# Altium PCB pyboard.PcbDoc
Units mil, origin at the board's own origin, x right, y up, seen from the top; angles counter-clockwise.
Board outline 1338.58 x 1574.8 mil, 2 copper layers (Top, Bottom), stack 62.441 mil thick; 58 components, 68 nets, 249 pads, 63 vias.
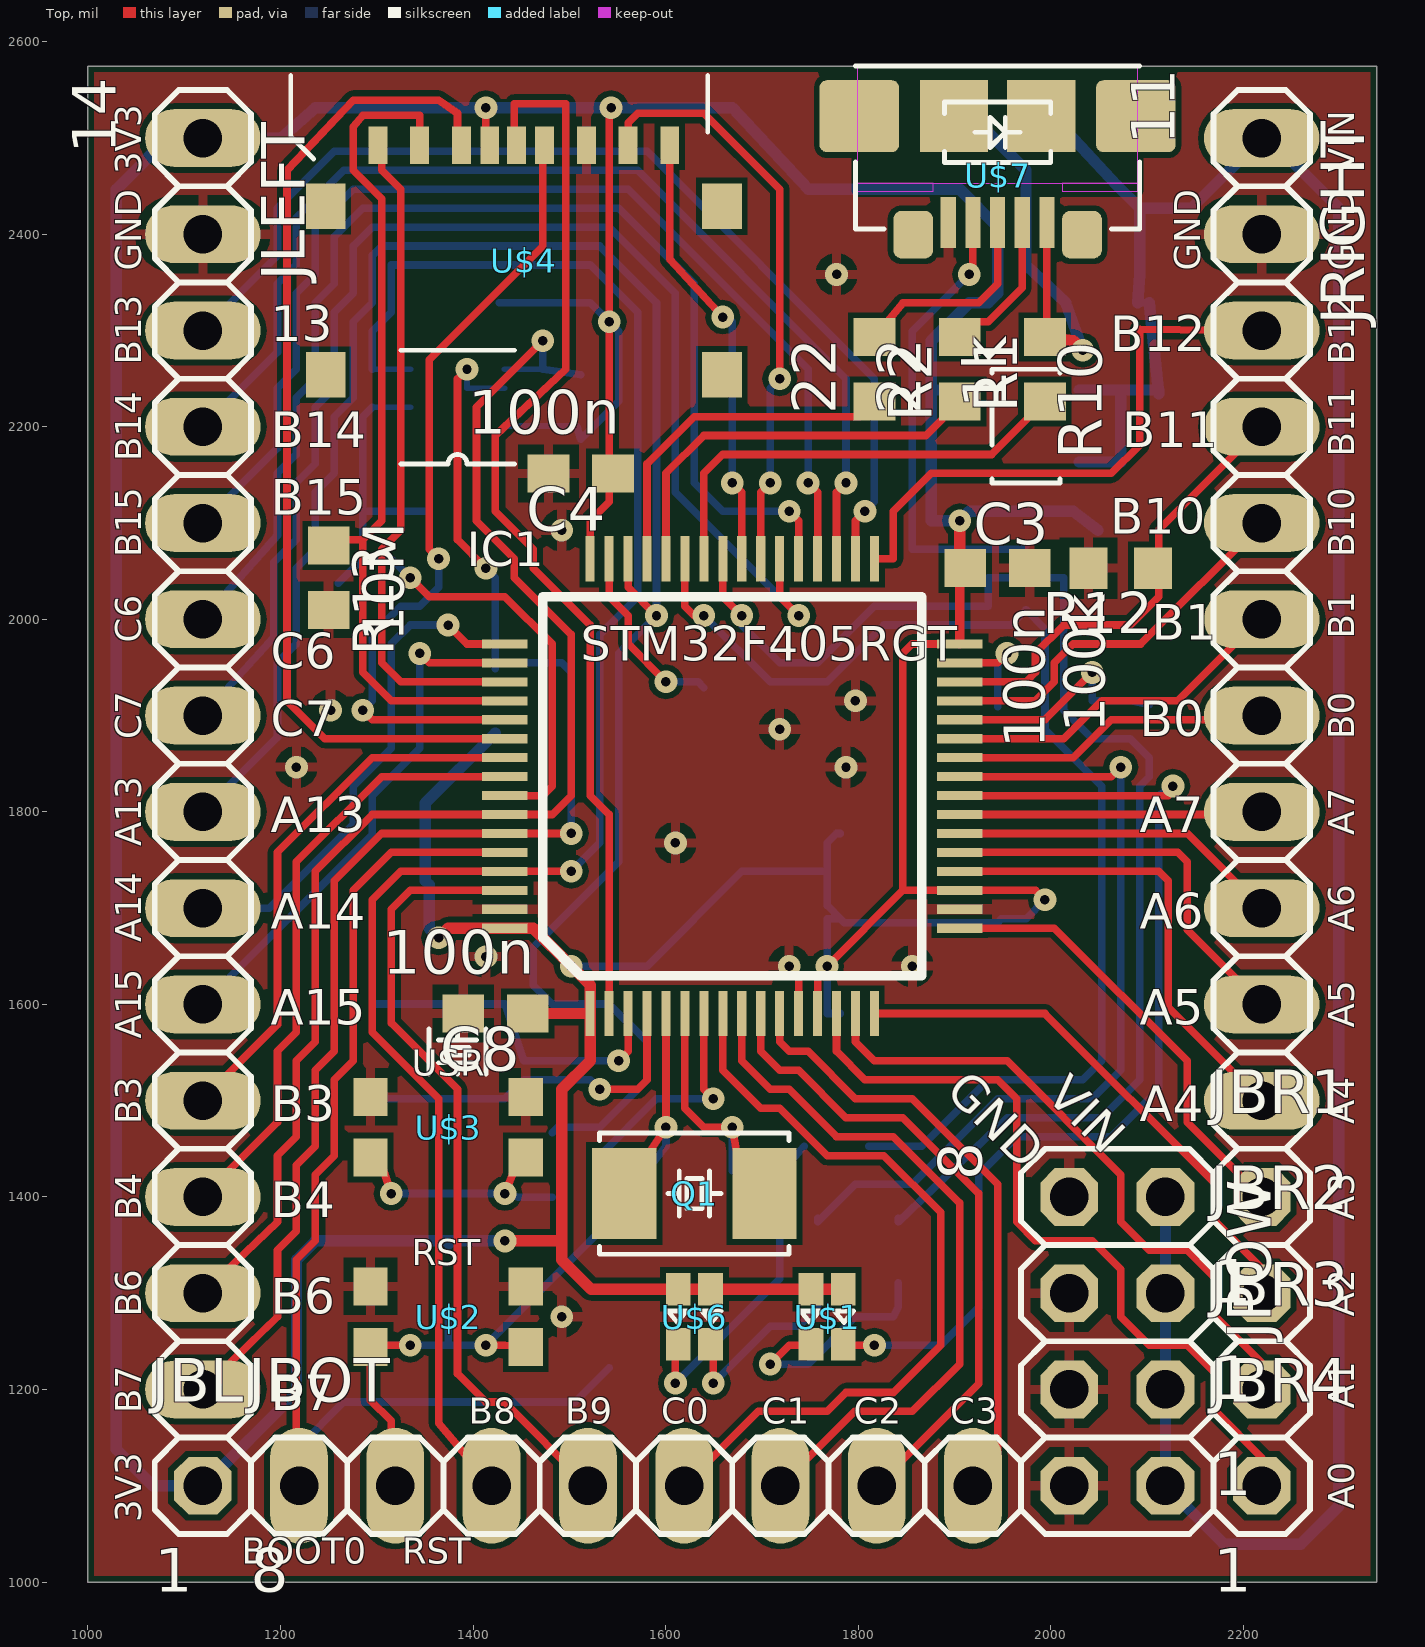
[diagram p0: Top view]
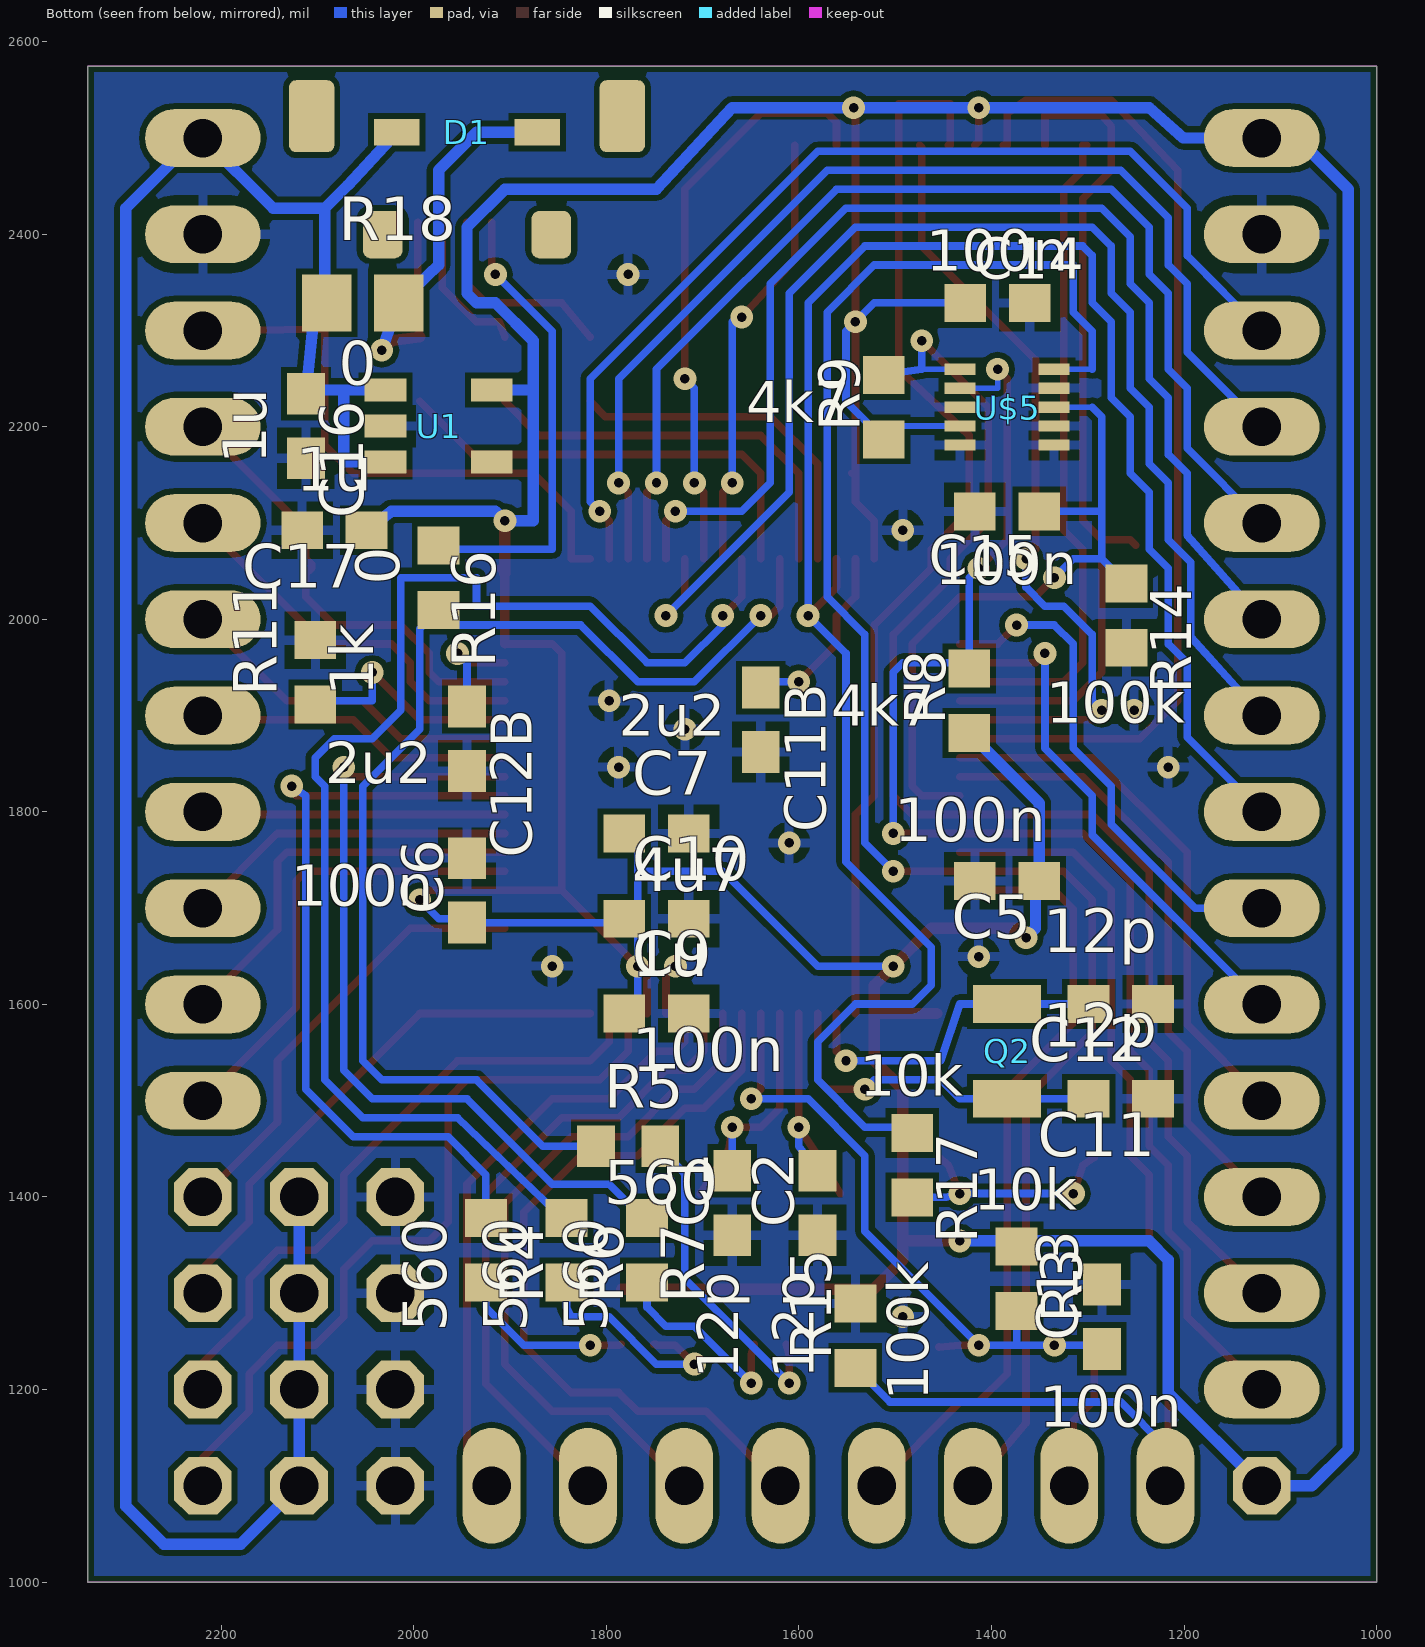
[diagram p1: Bottom view, seen from below]

## Layer stack, top to bottom
Top Solder: solder mask 0.4, Solder Resist, Dk 3.5
Top: signal copper 0.7087
Dielectric 1: core 61.0236, FR-4, Dk 4.8
Bottom: signal copper 0.7087
Bottom Solder: solder mask 0.4, Solder Resist, Dk 3.5

## Board outline
1000,1000 2338.58,1000 2338.58,2574.8 1000,2574.8

## Design rules (kind name [scope] priority, off if disabled: settings)
Clearance [All] p1: gap=5.91
Clearance "Clearance (Same Net)" [All] p2: gap=0
HoleSize HoleSize_1 [All] p1: absolutevalues=TRUE maxlimit=100000 minlimit=9.84 maxpercent=80.000 minpercent=20.000
HoleSize [All] p2: absolutevalues=TRUE maxlimit=100 minlimit=1 maxpercent=80.000 minpercent=20.000
HoleToHoleClearance mdViaViaSameLayer [All] p1: gap=7.87 allowstackedmicrovias=TRUE
HoleToHoleClearance [All] p2: gap=10 allowstackedmicrovias=TRUE
PasteMaskExpansion mlMinCreamFrame [All] p1: expansion=0
PasteMaskExpansion [All] p2: expansion=0
PolygonConnect PolygonConnect_1 [All] p1: connectstyle=Relief reliefconductorwidth=10 reliefentries=4 polygonreliefangle="90 Angle" airgapwidth=10
PolygonConnect [All] p2: connectstyle=Relief reliefconductorwidth=10 reliefentries=4 polygonreliefangle="90 Angle" airgapwidth=10
RoutingVias [All] p1: holewidth=28 width=50 viastyle="Through Hole" minholewidth=28 minwidth=50 maxholewidth=28 maxwidth=50
SilkToSilkClearance [All] p1 off: silktosilkclearance=10
SilkToSolderMaskClearance [IsPad] p1 off: minsilkscreentomaskgap=10 clearancetoexposedcopper=TRUE
SolderMaskExpansion mlMinStopFrame [All] p1: expansion=0
SolderMaskExpansion [All] p2: expansion=4
Width Width_1 [All] p1: maxlimit=100000 minlimit=5.91 preferedwidth=10
Width [All] p2: maxlimit=10 minlimit=10 preferedwidth=10
25 further rules are at their usual default settings.

## Components (designator, comment, footprint, x,y, rotation, side; value= is the part's Value field where it differs from the comment)
C1 "12p" C0603 1669.29,1393.7 r90 bottom
C2 "12p" C0603 1580.71,1393.7 r90 bottom
C3 "100n" C0603 1944.88,2053.15 r0 top
C4 "100n" C0603 1511.81,2151.57 r180 top
C5 "100n" C0603 1383.86,1728.35 r0 bottom
C6 "100n" C0603 1944.88,1718.5 r90 bottom
C7 "4u7" C0603 1748.03,1777.56 r180 bottom
C8 "100n" C0603 1423.23,1590.55 r180 top
C9 "100n" C0603 1748.03,1590.55 r180 bottom
C10 "1u" C0603 1748.03,1688.98 r180 bottom
C11 "12p" C0603 1265.75,1501.97 r0 bottom
C11B "2u2" C0603 1639.76,1895.67 r270 bottom
C12 "12p" C0603 1265.75,1600.39 r0 bottom
C12B "2u2" C0603 1944.88,1875.98 r270 bottom
C13 "100n" C0603 1285.43,1275.59 r90 bottom
C14 "100n" C0603 1393.7,2328.74 r180 bottom
C15 "100n" C0603 1383.86,2112.2 r0 bottom
C16 "1u" C0603 2112.2,2200.79 r270 bottom
C17 "1u" C0603 2082.68,2092.52 r0 bottom
D1 "" SOD-123 1944.88,2505.91 r0 bottom
IC1 "STM32F405RGT" LQFP64 1669.29,1826.77 r0 top
JBL "1" 1X01 1119.29,1100 r0 top
JBOT "8" 1X08 1569.29,1100 r0 top
JBR1 "1" 1X01 2219.29,1400 r0 top
JBR2 "1" 1X01 2219.29,1300 r0 top
JBR3 "1" 1X01 2219.29,1200 r0 top
JBR4 "1" 1X01 2219.29,1100 r0 top
JLEFT "14" 1X14 1119.29,1850 r270 top
JPOW "8" 2X04 2069.29,1250 r270 top
JRIGHT "11" 1X11 2219.29,2000 r270 top
Q1 "" TXC-SMD-50X32 1629.92,1403.54 r0 top
Q2 "" TXC-SMD-32X15 1383.86,1551.18 r270 bottom
R1 "22" R0603 1905.51,2259.84 r270 top
R2 "22" R0603 1816.93,2259.84 r270 top
R3 "10k" R0603 1374.02,1314.96 r270 bottom
R4 "560" R0603 1925.2,1344.49 r270 bottom
R5 "560" R0603 1777.56,1452.76 r180 bottom
R6 "560" R0603 1841.54,1344.49 r270 bottom
R7 "560" R0603 1757.87,1344.49 r270 bottom
R8 "4k7" R0603 1423.23,1915.35 r90 bottom
R9 "4k7" R0603 1511.81,2220.47 r90 bottom
R10 "1k" R0603 1994.09,2259.84 r270 top
R11 "1k" R0603 2102.36,1944.88 r90 bottom
R12 "100k" R0603 2072.83,2053.15 r180 top
R13 "10M" R0603 1250,2043.31 r270 top
R14 "100k" R0603 1259.84,2003.94 r270 bottom
R15 "100k" R0603 1541.34,1255.91 r90 bottom
R16 "0" R0603 1974.41,2043.31 r270 bottom
R17 "10k" R0603 1482.28,1433.07 r270 bottom
R18 "0" R0805 2053.15,2328.74 r180 bottom
U1 "" SOT-23-5 1974.41,2200.79 r270 bottom
U$1 "" LTST-BILED-15X16 1767.72,1275.59 r0 top
U$2 "" KMR4SWITCH 1374.02,1275.59 r0 top
U$3 "" KMR4SWITCH 1374.02,1472.44 r0 top
U$4 "" MOLEX-SD-105027-PKG 1452.76,2230.31 r180 top
U$5 "" DFN10 1383.86,2220.47 r270 bottom
U$6 "" LTST-BILED-15X16 1629.92,1275.59 r0 top
U$7 "" HRS-USB-ZX62D-AB-5P8-PKG 1944.88,2522.64 r180 top

## Footprints (in the part's own frame and the unit in brackets; to place one, negate y for a bottom-side part, rotate by r counter-clockwise, add the part's x,y. Pads: shape width x height; smd on the part's side, far side on the other; paste and mask are expansions set on the pad)
1X01 [mil] "1X01"
  oct 60x60 hole 40: 1(0,0)
  silkscreen extent -50,-50 50,50
1X08 [mil] "1X08"
  oval 60x120 hole 40: 1(-350,0) 2(-250,0) 3(-150,0) 4(-50,0) 5(50,0) 6(150,0) 7(250,0) 8(350,0)
  silkscreen extent -400,-50 400,50
1X11 [mil] "1X11"
  oval 60x120 hole 40: 1(-500,0) 2(-400,0) 3(-300,0) 4(-200,0) 5(-100,0) 6(0,0) 7(100,0) 8(200,0) 9(300,0) 10(400,0) 11(500,0)
  silkscreen extent -550,-50 550,50
1X14 [mil] "1X14"
  oval 60x120 hole 40: 1(-650,0) 2(-550,0) 3(-450,0) 4(-350,0) 5(-250,0) 6(-150,0) 7(-50,0) 8(50,0) 9(150,0) 10(250,0) 11(350,0) 12(450,0) 13(550,0) 14(650,0)
  silkscreen extent -700,-50 700,50
2X04 [mil] "2X04"
  oct 60x60 hole 40: 1(-150,-50) 2(-150,50) 3(-50,-50) 4(-50,50) 5(50,-50) 6(50,50) 7(150,-50) 8(150,50)
  silkscreen extent -200,-100 200,100
C0603 [mm] "C0603"
  rect 1.1x1 smd: 1(-0.85,0) 2(0.85,0)
DFN10 [mm] "DFN10"
  rect 0.3x0.825 smd: P$1(1,1.24) P$2(0.5,1.24) P$3(0,1.24) P$4(-0.5,1.24) P$5(-1,1.24) P$6(-1,-1.24) P$7(-0.5,-1.24) P$8(0,-1.24) P$9(0.5,-1.24) P$10(1,-1.24)
HRS-USB-ZX62D-AB-5P8-PKG [mm] "HRS-USB-ZX62D-AB-5P8-PKG"
  rect 0.4x1.35 smd: P$1(-1.3,2.8) P$2(-0.65,2.8) P$3(0,2.8) P$4(0.65,2.8) P$5(1.3,2.8)
  rect 1.8x1.9 smd: P$6(-1.15,0) P$7(1.15,0)
  rrect20% 2.1x1.9 smd: P$8(-3.65,0) P$9(3.65,0)
  rrect40% 1.05x1.25 smd: P$10(-2.225,3.125) P$11(2.225,3.125)
  rrect40% 1.05x1.25 smd far side: P$12(-2.225,3.125) P$13(2.225,3.125)
  rrect31% 1.2x1.9 smd far side: P$14(4.1,0) P$15(-4.1,0)
  Top keep-out region: -3.7,-1.325 3.7,-1.325 3.7,1.775 -3.7,1.775
  Top keep-out region: -3.7,1.775 -1.7,1.775 -1.7,1.975 -3.7,1.975
  Top keep-out region: 1.7,1.775 3.7,1.775 3.7,1.975 1.7,1.975
  silkscreen extent -3.75,-1.33 3.75,2.98
KMR4SWITCH [mil] "KMR4SWITCH"
  rect 35.43x39.37 smd: P$1(80.71,31.5) P$2(-80.71,31.5) P$3(-80.71,-31.5) P$4(80.71,-31.5)
LQFP64 [mm] "LQFP64"
  rect 0.24x1.2 smd: 1(-3.75,-6) 2(-3.25,-6) 3(-2.75,-6) 4(-2.25,-6) 5(-1.75,-6) 6(-1.25,-6) 7(-0.75,-6) 8(-0.25,-6) 9(0.25,-6) 10(0.75,-6) 11(1.25,-6) 12(1.75,-6) 13(2.25,-6) 14(2.75,-6) 15(3.25,-6) 16(3.75,-6) 33(3.75,6) 34(3.25,6) 35(2.75,6) 36(2.25,6) 37(1.75,6) 38(1.25,6) 39(0.75,6) 40(0.25,6) 41(-0.25,6) 42(-0.75,6) 43(-1.25,6) 44(-1.75,6) 45(-2.25,6) 46(-2.75,6) 47(-3.25,6) 48(-3.75,6)
  rect 1.2x0.24 smd: 17(6,-3.75) 18(6,-3.25) 19(6,-2.75) 20(6,-2.25) 21(6,-1.75) 22(6,-1.25) 23(6,-0.75) 24(6,-0.25) 25(6,0.25) 26(6,0.75) 27(6,1.25) 28(6,1.75) 29(6,2.25) 30(6,2.75) 31(6,3.25) 32(6,3.75) 49(-6,3.75) 50(-6,3.25) 51(-6,2.75) 52(-6,2.25) 53(-6,1.75) 54(-6,1.25) 55(-6,0.75) 56(-6,0.25) 57(-6,-0.25) 58(-6,-0.75) 59(-6,-1.25) 60(-6,-1.75) 61(-6,-2.25) 62(-6,-2.75) 63(-6,-3.25) 64(-6,-3.75)
  silkscreen extent -5,-5 5,5
LTST-BILED-15X16 [mm] "LTST-BILED-15X16"
  rect 0.65x0.85 smd: P$1(0.425,0.725) P$2(-0.425,0.725) P$3(0.425,-0.725) P$4(-0.425,-0.725)
  silkscreen extent -0.7,-0.15 0.7,0.15
MOLEX-SD-105027-PKG [mm] "MOLEX-SD-105027-PKG"
  rect 0.5x1 smd: G$1(0.2,-6.66) P$1(3.85,-6.66) P$2(2.75,-6.66) P$3(1.65,-6.66) P$4(0.9,-6.66) P$5(-0.55,-6.66) P$6(-1.65,-6.66) P$7(-2.75,-6.66) P$8(-3.85,-6.66)
  rect 1.05x1.2 smd: M$1(5.225,-0.6) M$2(5.225,-5.05) M$3(-5.225,-0.6) M$4(-5.225,-5.05)
  silkscreen extent -4.85,-8.5 6.15,-6.3
R0603 [mm] "R0603"
  rect 1x1.1 smd: 1(-0.85,0) 2(0.85,0)
R0805 [mil] "R0805"
  rect 51.18x59.06 smd: 1(-37.4,0) 2(37.4,0)
SOD-123 [mil] "SOD-123"
  rect 47.24x27.56 smd: A(-72.83,0) K(72.83,0)
SOT-23-5 [mil] "SOT-23-5"
  rect 23.62x43.31 smd: P$1(-37.4,-55.12) P$2(0,-55.12) P$3(37.4,-55.12) P$4(37.4,55.12) P$5(-37.4,55.12)
TXC-SMD-32X15 [mm] "TXC-SMD-32X15"
  rect 1x1.8 smd: P$1(-1.25,0) P$2(1.25,0)
TXC-SMD-50X32 [mil] "TXC-SMD-50X32"
  rect 66.93x94.49 smd: P$1(-72.83,0) P$2(72.83,0)
  silkscreen extent -98,-63 98,63

## Part data
C1 C2 C3 C4 C5 C6 C7 C8 C9 C10 C11 C11B C12 C12B C13 C14 C15 C16 C17: library part C0603
D1: library part SOD-123
IC1: library part LQFP64
JBL JBR1 JBR2 JBR3 JBR4: library part 1X01
JBOT: library part 1X08
JLEFT: library part 1X14
JPOW: library part 2X04
JRIGHT: library part 1X11
Q1: library part TXC-SMD-50X32
Q2: library part TXC-SMD-32X15
R1 R2 R3 R4 R5 R6 R7 R8 R9 R10 R11 R12 R13 R14 R15 R16 R17: library part R0603
R18: library part R0805
U1: library part SOT-23-5
U$1 U$6: library part LTST-BILED-15X16
U$2 U$3: library part KMR4SWITCH
U$4: library part MOLEX-SD-105027-PKG
U$5: library part DFN10
U$7: library part HRS-USB-ZX62D-AB-5P8-PKG

## Via types
v1: diameter 23.62/23.62 (per signal layer), hole 9.84, Top to Bottom, 63 vias

## Nets (pads, with @x,y where several pads share a name; then routed paths per layer and width w, separated by ;. In a path a pad name is that pad's centre, name@x,y a point inside that pad or via, vN(x,y) a via of type N, cw(c..) or ccw(c..) an arc to the next point about the centre after c; other vN are vias at no path point)
+3V3: C3.1 C4.1 C5.1 C6.1 C7.1 C8.1 C9.1 C10.1 C14.1 C17.1 IC1.1 IC1.13 IC1.19 IC1.32 IC1.48 IC1.64 JBL.1 JLEFT.1 R3.1 R8.1 R9.1 U1.P$5 U$1.P$1 U$1.P$2 U$4.P$4 U$5.P$9 U$6.P$1 U$6.P$2 | length 7068.9
  Top w7.87: v1(1413.39,2531.5) 1413.39,2496.46 U$4.P$4 ; IC1.48 1521.65,2102.36 1541.34,2122.05 C4.1@1541.34,2151.57 ; v1(1543.31,2531.5) 1543.31,2527.56 1541.34,2525.59 v1(1541.34,2309.06) C4.1@1541.34,2151.57 ; C4.1 C4.1@1541.34,2151.57 ; IC1.13 1757.87,1629.92 v1(1767.72,1639.76) 1846.46,1718.5 ; IC1.32 1856.3,1974.41 1846.46,1964.57 1846.46,1718.5 ; C3.1@1905.51,2047.24 C3.1 ; v1(1994.09,1708.66) 1984.25,1718.5 IC1.19 1846.46,1718.5
  Top w9.84: IC1.32 C3.1@1905.51,2043.31
  Top w11.81: v1(1364.17,1669.29) 1374.02,1679.13 IC1.64 1462.6,1679.13 v1(1501.97,1639.76) 1521.65,1620.08 IC1.1 ; v1(1433.07,1354.33) 1492.13,1354.33 ; C8.1 IC1.1 ; U$1.P$1 U$1.P$2 U$6.P$1 U$6.P$2 1522.64,1304.13 1492.13,1334.65 1492.13,1354.33 ; C3.1@1905.51,2047.24 v1(1905.51,2102.36) ; 1492.13,1354.33 1492.13,1511.81 1521.65,1541.34 IC1.1
  Bottom w5.91: U$5.P$9 R9.1@1507.87,2200.79
  Bottom w7.87: JLEFT.1@1115.35,2496.06 JLEFT.1 ; JBL.1 JBL.1@1119.69,1100 ; C5.1 C5.1@1354.33,1724.41 ; R3.1 1383.86,1358.27 R3.1@1393.7,1354.33 ; C14.1 1521.65,2328.74 v1(1541.34,2309.06) 1551.18,2299.21 1551.18,2226.38 R9.1 R9.1@1507.87,2200.79 ; v1(1501.97,1639.76) 1580.71,1639.76 1679.13,1738.19 1767.72,1738.19 ; C9.1 1767.72,1590.55 v1(1767.72,1639.76) 1767.72,1688.98 C10.1 ; C7.1 1777.56,1777.56 1767.72,1767.72 1767.72,1738.19 ; 1875.98,2240.16 1877.95,2238.19 ; v1(1994.09,1708.66) 1974.41,1688.98 1948.82,1688.98 C6.1 1785.43,1685.04 C10.1 ; 1767.72,1738.19 1767.72,1702.76 C10.1
  Bottom w11.81: JLEFT.1@1115.35,2496.06 1078.74,2496.06 1029.53,2446.85 1029.53,1137.8 1067.32,1100 JBL.1 ; JLEFT.1 1200.79,2500 1236.22,2531.5 v1(1413.39,2531.5) v1(1543.31,2531.5) 1669.29,2531.5 1748.03,2446.85 1905.51,2446.85 1944.88,2407.48 1944.88,2338.58 1935.04,2328.74 1915.35,2328.74 1875.98,2289.37 1875.98,2240.16 1875.98,2102.36 v1(1905.51,2102.36) 1915.35,2112.2 2023.62,2112.2 C17.1 ; JBL.1@1119.69,1100 1216.54,1196.85 1216.54,1334.65 1236.22,1354.33 1393.7,1354.33 v1(1433.07,1354.33) ; C5.1 1350.39,1809.06 R8.1 ; C5.1@1354.33,1724.41 1354.33,1679.13 v1(1364.17,1669.29) ; 1877.95,2238.19 U1.P$5
BOOT0: IC1.60 JBOT.1 R15.1 | length 1214.4
  Top w7.87: JBOT.1 1216.54,1102.76 1216.54,1334.65 1236.22,1354.33 1236.22,1423.23 1255.91,1442.91 1255.91,1521.65 1275.59,1541.34 1275.59,1718.5 1314.96,1757.87 IC1.60
  Bottom w7.87: JBOT.1 1219.29,1140.55 1265.75,1187.01 1505.91,1187.01 R15.1
FS_DM: IC1.44 R1.2 | length 424.7
  Top w7.87: IC1.44 1600.39,2151.57 1639.76,2190.94 1870.08,2190.94 R1.2
FS_DP: IC1.45 R2.2 | length 361.6
  Top w7.87: IC1.45 1580.71,2161.42 1629.92,2210.63 1801.18,2210.63 R2.2
FS_VUSB: IC1.42 R10.2 | length 473.9
  Top w7.87: IC1.42 1639.76,2151.57 1659.45,2171.26 1938.98,2171.26 R10.2
GND: C1.1 C2.1 C3.2 C4.2 C5.2 C6.2 C7.2 C8.2 C9.2 C10.2 C11.1 C11B.2 C12.1 C12B.2 C13.2 C14.2 C15.2 C16.2 C17.2 IC1.12 IC1.18 IC1.63 JLEFT.2 JPOW.1 JPOW.3 JPOW.5 JPOW.7 JRIGHT.2 R11.2 R12.2 R13.2 R14.2 R15.2 U1.P$2 U$2.P$1 U$2.P$2 U$3.P$1 U$3.P$2 U$4.P$6 U$5.P$1 U$5.P$2 U$5.P$4 U$5.P$8 U$5.P$10 U$7.P$5 | length 53.3
  Top w7.87: v1(1728.35,1639.76) 1738.19,1629.92 IC1.12
  other v1: 1492.13,1275.59 1856.3,1639.76 1413.39,1649.61 1610.24,1767.72 1216.54,1846.46 1787.4,1846.46 1718.5,1885.83 1251.97,1905.51 1797.24,1915.35 1492.13,2092.52 1777.56,2358.27
IO_PA0: IC1.14 JBR4.1 | length 821.7
  Top w7.87: IC1.14@1777.56,1580.71 IC1.14 1777.56,1551.18 1807.09,1521.65 1944.88,1521.65 1964.57,1501.97 1964.57,1374.02 1984.25,1354.33 2043.31,1354.33 2072.83,1324.8 2072.83,1275.59 2102.36,1246.06 2141.73,1246.06 2171.26,1216.54 2171.26,1177.17 2219.29,1129.13 JBR4.1
IO_PA1: IC1.15 JBR3.1 | length 669.1
  Top w7.87: IC1.15 1797.24,1561.02 1816.93,1541.34 1954.72,1541.34 2072.83,1423.23 2072.83,1374.02 2102.36,1344.49 2141.73,1344.49 2171.26,1314.96 2171.26,1275.59 2219.29,1227.56 JBR3.1
IO_PA2: IC1.16 JBR2.1 | length 561
  Top w7.87: IC1.16 1994.09,1590.55 2171.26,1413.39 2171.26,1374.02 2219.29,1325.98 JBR2.1
IO_PA3: IC1.17 JBR1.1 | length 466.8
  Top w7.87: IC1.17 2003.94,1679.13 2141.73,1541.34 2141.73,1477.56 JBR1.1
IO_PA4: IC1.20 JRIGHT.11 | length 489.2
  Top w7.87: IC1.20 2112.2,1738.19 2122.05,1728.35 2122.05,1597.24 JRIGHT.11
IO_PA5: IC1.21 JRIGHT.10 | length 420.5
  Top w7.87: IC1.21 2131.89,1757.87 2141.73,1748.03 2141.73,1677.56 JRIGHT.10
IO_PA6: IC1.22 JRIGHT.9 | length 345.9
  Top w7.87: IC1.22 2141.73,1777.56 JRIGHT.9
IO_PA7: IC1.23 JRIGHT.8 | length 314.9
  Top w7.87: IC1.23 2216.54,1797.24 JRIGHT.8
IO_PA14: IC1.49 JLEFT.9 | length 530.2
  Top w7.87: v1(1374.02,1994.09) 1393.7,1974.41 IC1.49
  Bottom w7.87: JLEFT.9 1188.19,1700 1275.59,1787.4 1275.59,1826.77 1314.96,1866.14 1314.96,1974.41 1334.65,1994.09 v1(1374.02,1994.09)
IO_PA15: IC1.50 JLEFT.10 | length 550.5
  Top w7.87: v1(1344.49,1964.57) 1354.33,1954.72 IC1.50
  Bottom w7.87: JLEFT.10 1295.28,1775.98 1295.28,1816.93 1344.49,1866.14 v1(1344.49,1964.57)
IO_PB0: IC1.26 JRIGHT.7 | length 331.9
  Top w7.87: IC1.26 2023.62,1856.3 2062.99,1895.67 2214.96,1895.67 JRIGHT.7
IO_PB1: IC1.27 JRIGHT.6 | length 365.2
  Top w7.87: IC1.27 2013.78,1875.98 2053.15,1915.35 2131.89,1915.35 2210.63,1994.09 2213.39,1994.09 JRIGHT.6
IO_PB2: IC1.28 R11.1 | length 247.1
  Top w7.87: IC1.28 1994.09,1895.67 v1(2043.31,1944.88)
  Bottom w7.87: v1(2043.31,1944.88) 2043.31,1915.35 2082.68,1915.35 R11.1
IO_PB3: IC1.55 JLEFT.11 | length 567
  Top w7.87: JLEFT.11 1119.29,1501.57 1196.85,1579.13 1196.85,1757.87 1295.28,1856.3 IC1.55
IO_PB4: IC1.56 JLEFT.12 | length 641.5
  Top w7.87: JLEFT.12 1196.85,1477.56 1196.85,1551.18 1216.54,1570.87 1216.54,1748.03 1305.12,1836.61 IC1.56
IO_PB9: IC1.62 JBOT.4 | length 820.8
  Top w7.87: IC1.62 1334.65,1718.5 1314.96,1698.82 1314.96,1580.71 1383.86,1511.81 1383.86,1216.54 1413.39,1187.01 1432.28,1187.01 JBOT.4
IO_PB10: IC1.29 JRIGHT.5 | length 401.8
  Top w7.87: IC1.29 1984.25,1915.35 2003.94,1935.04 2003.94,1954.72 2023.62,1974.41 2093.7,1974.41 JRIGHT.5
IO_PB11: IC1.30 JRIGHT.4 R12.1 | length 480.5
  Top w7.87: IC1.30 1974.41,1935.04 1984.25,1944.88 1984.25,1964.57 2013.78,1994.09 2082.68,1994.09 2112.2,2023.62 2112.2,2047.24 R12.1 2106.3,2057.09 2112.2,2062.99 2112.2,2092.91 JRIGHT.4
IO_PB12: IC1.33 JRIGHT.3 | length 600.2
  Top w7.87: IC1.33 1836.61,2062.99 1836.61,2112.2 1875.98,2151.57 2062.99,2151.57 2092.52,2181.1 2092.52,2301.18 JRIGHT.3
IO_PB13: IC1.34 JLEFT.3 | length 1096.7
  Top w7.87: IC1.34 1797.24,2102.36 v1(1807.09,2112.2)
  Bottom w7.87: JLEFT.3 1196.85,2377.95 1196.85,2427.17 1255.91,2486.22 1580.71,2486.22 1816.93,2250 1816.93,2122.05 v1(1807.09,2112.2)
IO_PB14: IC1.35 JLEFT.4 | length 1129.6
  Top w7.87: IC1.35 1777.56,2131.89 v1(1787.4,2141.73)
  Bottom w7.87: JLEFT.4 1196.85,2277.56 1196.85,2348.43 1216.54,2368.11 1216.54,2417.32 1265.75,2466.54 1570.87,2466.54 1787.4,2250 v1(1787.4,2141.73)
IO_PB15: IC1.36 JLEFT.5 | length 1162.4
  Top w7.87: v1(1748.03,2141.73) 1757.87,2131.89 IC1.36
  Bottom w7.87: JLEFT.5 1196.85,2177.56 1196.85,2240.16 1216.54,2259.84 1216.54,2338.58 1236.22,2358.27 1236.22,2407.48 1275.59,2446.85 1561.02,2446.85 1748.03,2259.84 v1(1748.03,2141.73)
IO_PC0: IC1.8 JBOT.5 | length 811.4
  Top w7.87: JBOT.5 1696.46,1177.17 1767.72,1177.17 1787.4,1196.85 1836.61,1196.85 1885.83,1246.06 1885.83,1383.86 1826.77,1442.91 1767.72,1442.91 1718.5,1492.13 1698.82,1492.13 1659.45,1531.5 IC1.8
IO_PC1: IC1.9 JBOT.6 | length 742.6
  Top w7.87: IC1.9 1679.13,1541.34 1708.66,1511.81 1728.35,1511.81 1777.56,1462.6 1836.61,1462.6 1905.51,1393.7 1905.51,1226.38 1856.3,1177.17 1796.46,1177.17 JBOT.6
IO_PC2: IC1.10 JBOT.7 | length 674.3
  Top w7.87: IC1.10 1698.82,1551.18 1718.5,1531.5 1738.19,1531.5 1787.4,1482.28 1846.46,1482.28 1925.2,1403.54 1925.2,1205.91 JBOT.7
IO_PC3: IC1.11 JBOT.8 | length 641
  Top w7.87: IC1.11 1718.5,1561.02 1728.35,1551.18 1748.03,1551.18 1797.24,1501.97 1856.3,1501.97 1944.88,1413.39 1944.88,1125.59 JBOT.8
IO_PC6: IC1.37 JLEFT.6 | length 1241.1
  Top w7.87: v1(1728.35,2112.2) 1738.19,2102.36 IC1.37
  Bottom w7.87: JLEFT.6 1196.85,2087.4 1196.85,2151.57 1216.54,2171.26 1216.54,2230.31 1236.22,2250 1236.22,2328.74 1255.91,2348.43 1255.91,2397.64 1285.43,2427.17 1551.18,2427.17 1629.92,2348.43 1629.92,2141.73 1659.45,2112.2 v1(1728.35,2112.2)
IO_PC7: IC1.38 JLEFT.7 | length 1376.6
  Top w7.87: IC1.38 1718.5,2023.62 v1(1738.19,2003.94)
  Bottom w7.87: JLEFT.7 1192.91,1981.5 1192.91,2059.06 1216.54,2082.68 1216.54,2141.73 1236.22,2161.42 1236.22,2220.47 1255.91,2240.16 1255.91,2318.9 1275.59,2338.58 1275.59,2387.8 1295.28,2407.48 1541.34,2407.48 1610.24,2338.58 1610.24,2131.89 v1(1738.19,2003.94)
LEDG1: IC1.24 R4.1 | length 819.4
  Top w7.87: IC1.24 2122.05,1816.93 v1(2126.97,1826.77)
  Bottom w7.87: R4.1 1925.2,1423.23 1964.57,1462.6 2062.99,1462.6 2112.2,1511.81 2112.2,1816.93 v1(2126.97,1826.77)
LEDG2: IC1.25 R7.1 | length 870.5
  Top w7.87: IC1.25 2062.99,1836.61 v1(2072.83,1846.46)
  Bottom w7.87: R7.1 1757.87,1374.02 1797.24,1413.39 1856.3,1413.39 1944.88,1501.97 2043.31,1501.97 2072.83,1531.5 v1(2072.83,1846.46)
LEDR1: IC1.41 R6.1 | length 1382.2
  Top w7.87: IC1.41 1659.45,2023.62 v1(1679.13,2003.94)
  Bottom w7.87: v1(1679.13,2003.94) 1679.13,1994.09 1718.5,1954.72 1757.87,1954.72 1816.93,2013.78 1935.04,2013.78 1935.04,2043.31 2013.78,2043.31 2013.78,1905.51 2043.31,1875.98 2082.68,1875.98 2102.36,1856.3 2102.36,1836.61 2092.52,1826.77 2092.52,1521.65 2053.15,1482.28 1954.72,1482.28 1841.54,1374.02 R6.1
LEDR2: IC1.43 R5.1 R16.2 | length 1247.1
  Top w7.87: IC1.43 1620.08,2013.78 1629.92,2003.94 v1(1639.76,2003.94)
  Bottom w7.87: v1(1639.76,2003.94) 1708.66,1935.04 1767.72,1935.04 1826.77,1994.09 1958.66,1994.09 R16.2 1994.09,1990.16 1994.09,1885.83 2053.15,1826.77 2053.15,1541.34 2033.46,1521.65 1935.04,1521.65 1866.14,1452.76 R5.1
MMA_AVDD: C15.1 IC1.57 R14.1 U$5.P$3 | length 736.9
  Top w7.87: v1(1334.65,2043.31) 1354.33,2023.62 1433.07,2023.62 1482.28,1974.41 1482.28,1826.77 1472.44,1816.93 IC1.57
  Bottom w5.91: 1295.28,2220.47 U$5.P$3
  Bottom w7.87: R14.1 1285.43,2062.99 ; 1295.28,2220.47 1285.43,2210.63 1285.43,2112.2 ; v1(1334.65,2043.31) 1314.96,2062.99 1285.43,2062.99 ; C15.1 1285.43,2112.2 ; 1285.43,2062.99 1285.43,2112.2
MMA_INT: IC1.61 JBOT.3 U$5.P$5 | length 1918.1
  Top w7.87: JBOT.3 1364.17,1164.96 1364.17,1501.97 1295.28,1570.87 1295.28,1708.66 1324.8,1738.19 IC1.61 v1(1501.97,1738.19)
  Bottom w5.91: 1295.28,2259.84 U$5.P$5
  Bottom w7.87: 1295.28,2259.84 1295.28,2299.21 1314.96,2318.9 1314.96,2368.11 1521.65,2368.11 1570.87,2318.9 1570.87,2023.62 1531.5,1984.25 1531.5,1767.72 v1(1501.97,1738.19)
MMA_SCL: IC1.58 JLEFT.13 R9.2 U$5.P$6 | length 1436.9
  Top w7.87: JLEFT.13 1196.85,1374.02 1196.85,1442.91 1216.54,1462.6 1216.54,1541.34 1236.22,1561.02 1236.22,1738.19 1295.28,1797.24 IC1.58 1482.28,1797.24 1501.97,1816.93 1501.97,1984.25 1442.91,2043.31 1442.91,2062.99 1403.54,2102.36 1403.54,2220.47 v1(1472.44,2289.37)
  Bottom w5.91: U$5.P$6 1472.44,2259.84
  Bottom w7.87: v1(1472.44,2289.37) 1472.44,2259.84 R9.2
MMA_SDA: IC1.59 JLEFT.14 R8.2 U$5.P$7 | length 1492.2
  Top w7.87: JLEFT.14 1196.85,1275.59 1196.85,1344.49 1216.54,1364.17 1216.54,1433.07 1236.22,1452.76 1236.22,1531.5 1255.91,1551.18 1255.91,1728.35 1305.12,1777.56 IC1.59 v1(1501.97,1777.56) ; v1(1393.7,2259.84) 1383.86,2250 1383.86,2082.68 v1(1413.39,2053.15)
  Bottom w5.91: v1(1393.7,2259.84) 1393.7,2240.16 U$5.P$7
  Bottom w7.87: v1(1413.39,2053.15) 1423.23,2043.31 R8.2@1423.23,1954.72 ; R8.2 R8.2@1423.23,1954.72 ; v1(1501.97,1777.56) 1501.97,1944.88 1492.13,1954.72 R8.2@1423.23,1954.72
N$1: C11B.1 IC1.47 | length 194.2
  Top w7.87: IC1.47 1541.34,2023.62 1561.02,2003.94 1561.02,1974.41 v1(1600.39,1935.04)
  Bottom w7.87: v1(1600.39,1935.04) 1633.86,1935.04 C11B.1
N$2: C12B.1 IC1.31 | length 112.5
  Top w7.87: IC1.31 1944.88,1954.72 v1(1954.72,1964.57)
  Bottom w7.87: C12B.1 1944.88,1954.72 v1(1954.72,1964.57)
N$3: R2.1 U$7.P$3 | length 216.7
  Top w7.87: R2.1 1846.46,2328.74 1925.2,2328.74 1944.88,2348.43 U$7.P$3
N$4: R1.1 U$7.P$2 | length 158.5
  Top w7.87: R1.1 1911.42,2309.06 1935.04,2309.06 1970.47,2344.49 U$7.P$2
N$5: C12.2 IC1.3 Q2.P$1 | length 347.8
  Top w7.87: v1(1551.18,1541.34) 1561.02,1551.18 IC1.3
  Bottom w7.87: C12.2 Q2.P$1 1433.07,1600.39 1452.76,1541.34 v1(1551.18,1541.34)
N$6: C11.2 IC1.4 Q2.P$2 | length 366.7
  Top w7.87: v1(1531.5,1511.81) 1570.87,1511.81 1580.71,1521.65 IC1.4
  Bottom w7.87: C11.2 Q2.P$2 1433.07,1501.97 1452.76,1521.65 1521.65,1521.65 v1(1531.5,1511.81)
N$7: R16.1 U$7.P$4 | length 485.4
  Top w7.87: v1(1915.35,2358.27) 1919.29,2362.2 U$7.P$4
  Bottom w7.87: v1(1915.35,2358.27) 1856.3,2299.21 1856.3,2072.83 1970.47,2072.83 R16.1
N$9: C1.2 IC1.6 Q1.P$2 | length 279.1
  Top w7.87: IC1.6 1620.08,1492.13 1639.76,1472.44 v1(1669.29,1472.44) 1673.23,1448.82 Q1.P$2
  Bottom w7.87: C1.2 v1(1669.29,1472.44)
N$10: C2.2 IC1.5 Q1.P$1 | length 251.5
  Top w7.87: Q1.P$1 1580.71,1442.91 v1(1600.39,1472.44) IC1.5
  Bottom w7.87: C2.2 1600.39,1452.76 v1(1600.39,1472.44)
N$11: R4.2 U$1.P$3 | length 182.8
  Top w7.87: U$1.P$3 1787.4,1246.06 v1(1816.93,1246.06)
  Bottom w7.87: v1(1816.93,1246.06) 1885.83,1246.06 1925.2,1285.43 R4.2
N$12: R5.2 U$6.P$4 | length 341.2
  Top w7.87: v1(1610.24,1206.69) 1610.24,1236.22 U$6.P$4
  Bottom w7.87: v1(1610.24,1206.69) 1718.5,1314.96 1718.5,1423.23 R5.2
N$13: R6.2 U$1.P$4 | length 235.8
  Top w7.87: v1(1708.66,1226.38) 1728.35,1246.06 1748.03,1246.06 1749.02,1247.05 U$1.P$4
  Bottom w7.87: v1(1708.66,1226.38) 1748.03,1226.38 1797.24,1275.59 1836.61,1275.59 1841.54,1285.43 R6.2
N$14: R7.2 U$6.P$3 | length 207.2
  Top w7.87: U$6.P$3 1649.61,1236.22 v1(1649.61,1206.69)
  Bottom w7.87: v1(1649.61,1206.69) 1708.66,1265.75 1738.19,1265.75 1757.87,1285.43 R7.2
N$15: R17.2 U$3.P$3 U$3.P$4 | length 257.6
  Top w7.87: U$3.P$3 1305.12,1433.07 v1(1314.96,1403.54) ; v1(1433.07,1403.54) 1444.88,1433.07 U$3.P$4
  Bottom w7.87: v1(1314.96,1403.54) v1(1433.07,1403.54) 1446.85,1399.61 R17.2
NC: 
NRST: C13.1 IC1.7 JBOT.2 R3.2 U$2.P$3 U$2.P$4 | length 886.8
  Top w7.87: JBOT.2 1314.96,1104.33 1314.96,1167.32 1293.31,1188.98 U$2.P$3 1295.28,1246.06 v1(1334.65,1246.06) ; v1(1413.39,1246.06) 1433.07,1246.06 U$2.P$4 ; IC1.7 1639.76,1511.81 v1(1649.61,1501.97)
  Bottom w7.87: C13.1 1285.43,1246.06 v1(1334.65,1246.06) 1374.02,1246.06 ; R3.2 1374.02,1246.06 ; v1(1649.61,1501.97) 1590.55,1501.97 1531.5,1442.91 1531.5,1364.17 v1(1413.39,1246.06) 1374.02,1246.06
SDIO_CK: IC1.53 U$4.P$5 | length 836.7
  Top w7.87: v1(1285.43,1905.51) 1295.28,1895.67 IC1.53 ; v1(1364.17,2062.99) 1354.33,2072.83 1354.33,2269.69 1472.44,2387.8 1472.44,2490.55 U$4.P$5
  Bottom w7.87: v1(1285.43,1905.51) 1295.28,1915.35 1295.28,1984.25 1324.8,2013.78 1344.49,2013.78 1364.17,2033.46 v1(1364.17,2062.99)
SDIO_CMD: IC1.54 U$4.P$3 | length 1043.8
  Top w7.87: U$4.P$3 1383.86,2492.52 1383.86,2525.59 1364.17,2539.37 1275.59,2539.37 1206.69,2466.54 1206.69,1915.35 1246.06,1875.98 IC1.54
SDIO_D0: IC1.39 U$4.P$7 | length 609.4
  Top w7.87: U$4.P$7 1561.02,2515.75 1570.87,2525.59 1639.76,2525.59 1718.5,2446.85 v1(1718.5,2250) ; IC1.39 1698.82,2131.89 v1(1708.66,2141.73)
  Bottom w7.87: v1(1708.66,2141.73) 1708.66,2240.16 v1(1718.5,2250)
SDIO_D1: IC1.40 U$4.P$8 | length 461.2
  Top w7.87: U$4.P$8 1604.33,2374.02 v1(1659.45,2313.98) ; v1(1669.29,2141.73) 1679.13,2131.89 IC1.40
  Bottom w7.87: v1(1659.45,2313.98) 1669.29,2309.06 v1(1669.29,2141.73)
SDIO_D2: IC1.51 U$4.P$1 | length 694.1
  Top w7.87: U$4.P$1 1305.12,2492.52 1305.12,2466.54 1324.8,2446.85 1324.8,2092.52 1305.12,2072.83 1305.12,1954.72 1324.8,1935.04 IC1.51
SDIO_D3: IC1.52 R13.1 U$4.P$2 | length 890.6
  Top w7.87: R13.1 1255.91,2082.68 1285.43,2082.68 ; U$4.P$2 1344.49,2523.62 1285.43,2523.62 1275.59,2511.81 1275.59,2466.54 1305.12,2437.01 1305.12,2102.36 1285.43,2082.68 ; IC1.52 1314.96,1915.35 1285.43,1944.88 1285.43,2082.68
SDIO_SW: IC1.2 U$4.G$1 | length 1123.9
  Top w7.87: U$4.G$1 1442.91,2492.52 1442.91,2535.43 1496.46,2535.43 1496.46,2259.84 1423.23,2190.94 1423.23,2112.2 1462.6,2072.83 1462.6,2053.15 1521.65,1994.09 1521.65,1816.93 1541.34,1797.24 IC1.2
USR_SW: IC1.46 JLEFT.8 R17.1 | length 2110.8
  Top w7.87: IC1.46 1561.02,2033.46 v1(1590.55,2003.94)
  Bottom w7.87: JLEFT.8 1196.85,1877.56 1196.85,1954.72 1216.54,1974.41 1216.54,2053.15 1236.22,2072.83 1236.22,2131.89 1255.91,2151.57 1255.91,2210.63 1275.59,2230.31 1275.59,2309.06 1295.28,2328.74 1295.28,2377.95 1305.12,2387.8 1531.5,2387.8 1590.55,2328.74 v1(1590.55,2003.94) 1551.18,1964.57 1551.18,1748.03 1462.6,1659.45 1462.6,1620.08 1482.28,1600.39 1541.34,1600.39 1580.71,1561.02 1580.71,1521.65 1531.5,1472.44 1488.19,1472.44 R17.1
VIN: C16.1 D1.K JPOW.2 JPOW.4 JPOW.6 JPOW.8 JRIGHT.1 R18.1 U1.P$1 U1.P$3 | length 2655.4
  Bottom w7.87: R18.1 R18.1@2102.36,2328.74 ; JRIGHT.1 JRIGHT.1@2226.38,2500
  Bottom w11.81: D1.K 2068.9,2450.79 2092.52,2427.17 ; U1.P$3 2072.83,2163.39 2072.83,2238.19 ; U1.P$1 2072.83,2238.19 ; R18.1 2092.52,2358.27 2092.52,2427.17 ; R18.1@2102.36,2328.74 C16.1 2112.2,2238.19 2072.83,2238.19 ; JPOW.2 JPOW.4 JPOW.6 JPOW.8 2179.92,1039.37 2259.84,1039.37 2299.21,1078.74 2299.21,2427.17 JRIGHT.1@2226.38,2500 ; JRIGHT.1 2146.46,2427.17 2092.52,2427.17
VUSB: D1.A R10.1 R18.2 U$7.P$1 | length 489.4
  Top w7.87: R10.1 1996.06,2314.96 U$7.P$1
  Top w11.81: R10.1 2023.62,2289.37 v1(2033.46,2279.53)
  Bottom w11.81: D1.A 1935.04,2505.91 1974.41,2466.54 1974.41,2368.11 R18.2 v1(2033.46,2279.53)
pads on no net: U1.P$4 U$4.M$1 U$4.M$2 U$4.M$3 U$4.M$4 U$7.P$6 U$7.P$7 U$7.P$8 U$7.P$9 U$7.P$10 U$7.P$11 U$7.P$12 U$7.P$13 U$7.P$14 U$7.P$15

## Polygon pours and split planes (outlines as drawn)
GND on Bottom "Bottom-GND" (solid, remove dead copper, pour order 0): 994.1,994.1 994.1,2580.7 2344.49,2580.7 2344.49,994.1
GND on Top "Top-GND" (solid, remove dead copper, pour order 2): 994.1,994.1 994.1,2580.7 2344.49,2580.7 2344.49,994.1

## Keep-outs
Keep-Out Layer:
  the board outline again, w0

## Silkscreen, mask and mechanical layers (free items; w line width, h text height)
Top Overlay:
  text "VIN" at 2315.53,2464.4 h26.77 r90
  text "3V3" at 1055.53,2462.17 h26.77 r90
  text "GND" at 1055.53,2362.17 h26.77 r90
  text "GND" at 2155.53,2362.17 h26.77 r90
  text "GND" at 2315.53,2362.17 h26.77 r90
  text "13" at 1190,2288.65 h36.81
  text "B12" at 2062.11,2278.65 h36.81
  text "B13" at 1055.53,2264.4 h26.77 r90
  text "B12" at 2315.53,2264.4 h26.77 r90
  text "B14" at 1190,2178.65 h36.81
  text "B11" at 2074.37,2178.65 h36.81
  text "B11" at 2315.53,2168.86 h26.77 r90
  text "B14" at 1055.53,2164.4 h26.77 r90
  text "B15" at 1190,2108.65 h36.81
  text "B10" at 2062.11,2088.65 h36.81
  text "B15" at 1055.53,2064.4 h26.77 r90
  text "B10" at 2315.53,2064.4 h26.77 r90
  text "B1" at 2315.53,1980.01 h26.77 r90
  text "B1" at 2105.04,1978.65 h36.81
  text "C6" at 1055.53,1975.55 h26.77 r90
  text "C6" at 1190,1948.65 h36.81
  text "C7" at 1190,1878.65 h36.81
  text "B0" at 2092.77,1878.65 h36.81
  text "C7" at 1055.53,1875.55 h26.77 r90
  text "B0" at 2315.53,1875.55 h26.77 r90
  text "A13" at 1190,1778.65 h36.81
  text "A7" at 2092.77,1778.65 h36.81
  text "A7" at 2315.53,1775.55 h26.77 r90
  text "A13" at 1055.53,1764.4 h26.77 r90
  text "A14" at 1190,1678.65 h36.81
  text "A6" at 2092.77,1678.65 h36.81
  text "A6" at 2315.53,1675.55 h26.77 r90
  text "A14" at 1055.53,1664.4 h26.77 r90
  text "A15" at 1190,1578.65 h36.81
  text "A5" at 2092.77,1578.65 h36.81
  text "A5" at 2315.53,1575.55 h26.77 r90
  text "A15" at 1055.53,1564.4 h26.77 r90
  text "USR" at 1336.19,1525.81 h26.77
  text "GND" at 1889.37,1508.46 h36.81 r315
  text "VIN" at 1993.7,1504.13 h36.81 r315
  text "B3" at 1190,1478.65 h36.81
  text "A4" at 2092.77,1478.65 h36.81
  text "B3" at 1055.53,1475.55 h26.77 r90
  text "A4" at 2315.53,1475.55 h26.77 r90
  text "B4" at 1190,1378.65 h36.81
  text "B4" at 1055.53,1375.55 h26.77 r90
  text "A3" at 2315.53,1375.55 h26.77 r90
  text "RST" at 1336.19,1328.96 h26.77
  text "B6" at 1190,1278.65 h36.81
  text "B6" at 1055.53,1275.55 h26.77 r90
  text "A2" at 2315.53,1275.55 h26.77 r90
  text "A1" at 2315.53,1180.01 h26.77 r90
  text "B7" at 1190,1178.65 h36.81
  text "B7" at 1055.53,1175.55 h26.77 r90
  text "B8" at 1395.55,1164.47 h26.77
  text "B9" at 1495.55,1164.47 h26.77
  text "C0" at 1595.55,1164.47 h26.77
  text "C1" at 1700.01,1164.47 h26.77
  text "C2" at 1795.55,1164.47 h26.77
  text "C3" at 1895.55,1164.47 h26.77
  text "A0" at 2315.53,1075.55 h26.77 r90
  text "3V3" at 1055.53,1062.17 h26.77 r90
  text "BOOT0" at 1159.69,1018.76 h26.77
  text "RST" at 1326.45,1018.76 h26.77
Dimension:
  the board outline again, w0